# EAGLE board jlpcb-044 (EAGLE 5.06)
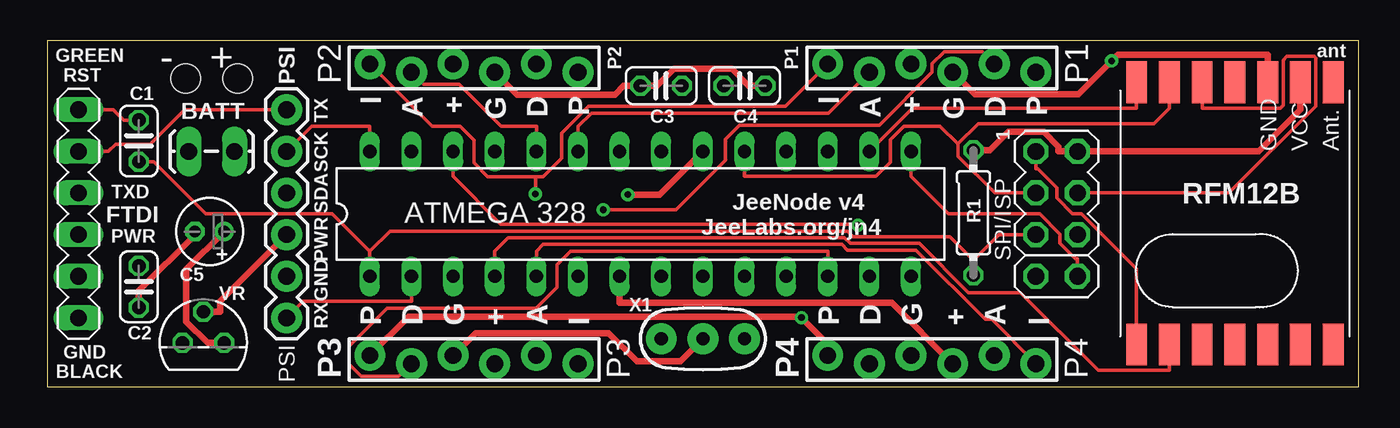
[diagram p0: board, top side]
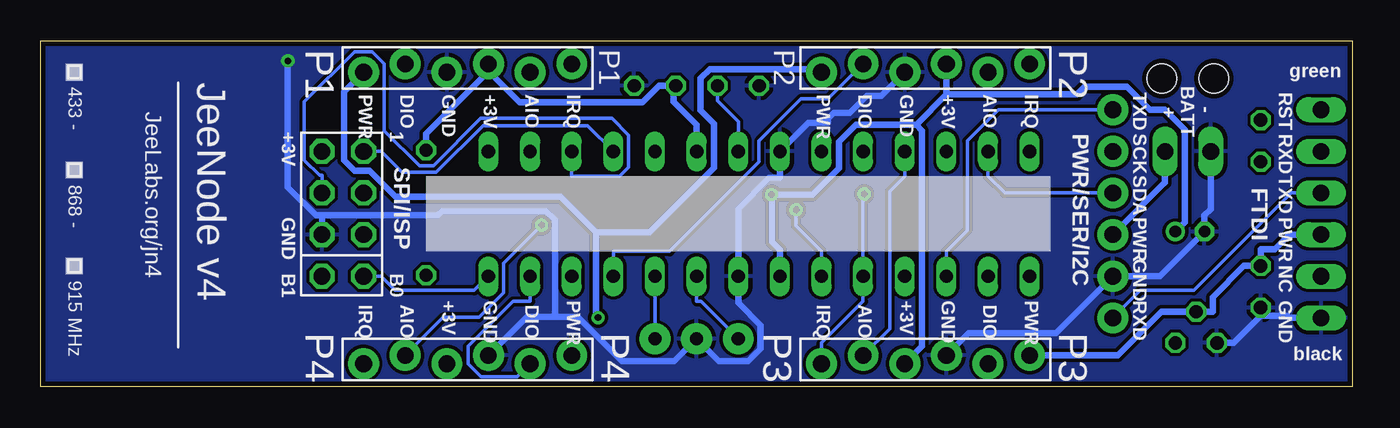
[diagram p1: board, bottom side, seen from below]

Size 80.01 x 21.08 mm. Coordinates in mm from the lower left corner, seen from the top.
Outline: 0,0 80.01,0 80.01,21.08 0,21.08 0,0
Copper layers (1*16): Top 0.035mm / dielectric 1.5mm / Bottom 0.035mm
Design rules "10mils *": minimum track width 8mil, minimum drill 0.4mm, track to track 8mil, track to pad 8mil, pad to pad 8mil, via to via 8mil, smd to smd 8mil, copper to edge 12mil, drill to drill 0.4mm, minimum pad ring 0.15mm, minimum via ring 8mil, stop-mask expansion 4mil, vias tented up to drill 20mil, thermal gap 10mil
Net classes: 1 power: width 0.406 mm
Holes 1.78 mm at 8.45,18.8 11.62,18.8

## Footprints (pad centres in the part's own frame; a part is rotated, then mirrored left to right if it is on the bottom)
C025-024X044 = drill 0.813 octagon: 1 -1.27,0; 2 1.27,0
E1,8-4 = drill 0.711 pad 1.168 round: + -0.889,0 | drill 0.711 pad 1.168 octagon: - 0.889,0
MA06-1 = drill 1.016 long: 1 -6.35,0; 2 -3.81,0; 3 -1.27,0; 4 1.27,0; 5 3.81,0; 6 6.35,0
DIL28-3 = drill 0.813 long: 1 -16.51,-3.81; 2 -13.97,-3.81; 3 -11.43,-3.81; 4 -8.89,-3.81; 5 -6.35,-3.81; 6 -3.81,-3.81; 7 -1.27,-3.81; 8 1.27,-3.81; 9 3.81,-3.81; 10 6.35,-3.81; 11 8.89,-3.81; 12 11.43,-3.81; 13 13.97,-3.81; 14 16.51,-3.81; 15 16.51,3.81; 16 13.97,3.81; 17 11.43,3.81; 18 8.89,3.81; 19 6.35,3.81; 20 3.81,3.81; 21 1.27,3.81; 22 -1.27,3.81; 23 -3.81,3.81; 24 -6.35,3.81; 25 -8.89,3.81; 26 -11.43,3.81; 27 -13.97,3.81; 28 -16.51,3.81
TO92 = drill 0.813 octagon: 1 -1.27,0; 2 0,1.905; 3 1.27,0
1X02_LOCK_LONGPADS = drill 1.016 long: 1 -0.127,0; 2 2.667,0
1X06_FEMALE_LOCK.010 = drill 1.016 pad 1.88 round: 1 0,0.254; 2 2.54,-0.254; 3 5.08,0.254; 4 7.62,-0.254; 5 10.16,0.254; 6 12.7,-0.254
1X06 = drill 1.016 pad 1.88 round: 1 0,0; 2 2.54,0; 3 5.08,0; 4 7.62,0; 5 10.16,0; 6 12.7,0
0204/7 = drill 0.813 octagon: 1 -3.81,0; 2 3.81,0
MA04-2 = drill 1.016 octagon: 1 -3.81,-1.27; 2 -3.81,1.27; 3 -1.27,-1.27; 4 -1.27,1.27; 5 1.27,-1.27; 6 1.27,1.27; 7 3.81,-1.27; 8 3.81,1.27
RFM12B = smd 2.54 x 1.27: ANT 8,-6; FFS -8,2; GND 8,-2; IRQ -8,4; P$8 -8,0; P$9 -8,-2; P$10 -8,-4; P$12 -8,-6; P$16 8,0; SCK 8,4; SDI 8,2; SDO -8,6; SEL 8,6; VDD 8,-4
RESONATOR-PTH = drill 0.8 pad 1.88 round: 1 -2.54,0; 2 0,0; 3 2.54,0

## Placement (x,y rotation side)
C1  0.1µ  [C025-024X044]  5.59,14.99 90 top
C2  0.1µ  [C025-024X044]  5.59,6.1 270 top
C3  0.1µ  [C025-024X044]  37.47,18.35 180 top
C4  0.1µ  [C025-024X044]  42.55,18.35 0 top
C5  10µ  [E1,8-4]  9.91,9.46 180 top
FTDI  FTDI  [MA06-1]  1.91,10.54 90 top
IC1  ATMEGA 328  [DIL28-3]  36.2,10.54 0 top
IC2  MCP1702-33  [TO92]  9.53,2.67 0 top
JP1  BATT  [1X02_LOCK_LONGPADS]  11.3,14.35 180 top
P1  JEEPORT  [1X06_FEMALE_LOCK.010]  60.33,19.43 180 top
P2  JEEPORT  [1X06_FEMALE_LOCK.010]  32.39,19.43 180 top
P3  JEEPORT  [1X06_FEMALE_LOCK.010]  19.68,1.65 0 top
P4  JEEPORT  [1X06_FEMALE_LOCK.010]  47.62,1.65 0 top
PWR/SER/I2C  PSI  [1X06]  14.61,4.19 90 top
R1  10k  [0204/7]  56.52,10.6 90 top
SV7  SPI/ISP  [MA04-2]  61.59,10.54 270 top
U$1  RFM12B  [RFM12B]  72.47,10.57 90 top
X1  16 MHz  [RESONATOR-PTH]  40.01,2.92 0 top

## Library data of the parts
C1-C5 R1 = resistor
FTDI IC2 P1-P4 SV7 U$1 = JeeLabs
IC1 = atmega8
JP1 PWR/SER/I2C X1 = SparkFun

## Nets
A0: IC1.23 P1.5
A1: IC1.24 P2.5
A2: IC1.25 P3.5
A3: IC1.26 P4.5
GND [power]: C2.2 C3.2 C4.2 C5.- FTDI.1 IC1.8 IC1.22 IC2.1 JP1.2 P1.3 P2.3 P3.3 P4.3 PWR/SER/I2C.2 SV7.6 U$1.GND X1.2
INT2: IC1.5 P1.6 P2.6 P3.6 P4.6
N$1: IC1.9 X1.1
N$2: IC1.18 SV7.1 U$1.SDO
N$3: IC1.17 SV7.4 U$1.SDI
N$4: IC1.16 U$1.SEL
N$5: IC1.19 SV7.3 U$1.SCK
N$6: IC1.15 SV7.8
N$7: IC1.4 U$1.IRQ
N$8: IC1.6 P1.2
N$9: IC1.11 P2.2
N$10: IC1.12 P3.2
N$11: IC1.13 P4.2
N$19: C3.1 IC1.21
N$20: C1.2 FTDI.6
N$21: IC1.10 X1.3
N$22: IC1.14 SV7.7
N$24: IC1.28 PWR/SER/I2C.5
N$25: IC1.27 PWR/SER/I2C.4
PWR [power]: C2.1 FTDI.3 IC2.2 JP1.1 P1.1 P2.1 P3.1 P4.1 PWR/SER/I2C.3
RST: C1.1 IC1.1 R1.1 SV7.5
RXD: FTDI.4 IC1.2 PWR/SER/I2C.1
TXD: FTDI.5 IC1.3 PWR/SER/I2C.6
VCC [power]: C4.1 C5.+ IC1.7 IC1.20 IC2.3 P1.4 P2.4 P3.4 P4.4 R1.2 SV7.2 U$1.VDD

## Tracks (layer width: path | path; a pad name or v marks a point on that pad's centre or on a via)
A0
  Top 0.203: P1.5 47.68,16.69 33.2,16.69 32.39,15.88 IC1.23
A1
  Top 0.203: IC1.24 29.84,15.88 27.68,15.88 25.12,18.44 22.96,18.44 P2.5
A2
  Bottom 0.203: P3.5 28.22,3.53 28.22,11.91 27.3,12.83 IC1.25
A3  (via drill 0.4 pad 0.81)
  Top 0.203: IC1.26 24.76,12.83 27.67,9.92 49.39,9.92 v49.46,9.85
  Bottom 0.203: P4.5 55.46,4.23 53.28,4.23 51.79,5.72 51.79,7.52 v49.46,9.85
GND  (via drill 0.4 pad 0.81)
  Top 0.406: C2.2 5.59,5.84 9.02,9.27 C5.- | P1.3 56.59,17.83 62.91,17.83 v64.95,19.87 65.32,20.24 74.47,20.24 U$1.GND | C4.2 43.31,18.35 42.8,18.35 41.77,19.38 38.23,19.38 37.21,18.35 C3.2 35.18,18.35 34.63,17.8 28.68,17.8 P2.3 | X1.2 38.63,1.55 35.98,1.55 34.26,3.27 26.13,3.27 P3.3
  Bottom 0.406: 48.65,4.25 47.28,4.25 44.57,1.54 41.39,1.54 X1.2 38.64,1.55 36.88,1.55 36.12,2.32 36.12,3.76 37.47,5.1 IC1.8 37.47,8.36 37.47,10.86 35.6,12.73 34.93,12.73 IC1.22 33.18,16.09 31.98,16.09 31.98,16.35 31.62,16.7 30.64,16.7 29.6,17.74 28.74,17.74 P2.3 | P4.3 50.36,4.25 48.65,4.25 | 62.87,10.44 55.81,10.44 55.54,10.71 49.18,10.71 48.65,10.18 48.65,4.25 | 62.87,10.44 63.22,10.44 64.95,12.17 v64.95,19.87 | 62.87,10.44 | P3.3 23.42,3.25 18.08,3.25 PWR/SER/I2C.2 11.75,6.73 C5.- 9.02,10.45 8.64,10.83 JP1.2 | 7.24,2.67 IC2.1 | 5.59,4.32 7.24,2.67 | 7.24,2.67 | 5.59,4.32 3.96,4.32 3.84,4.19 FTDI.1 | 5.59,4.32 C2.2 | 62.87,10.44 SV7.6
  pour Bottom: 0,21.08 80.01,21.08 80.01,0 0,0
INT2  (via drill 0.4 pad 0.81)
  Top 0.203: P4.6 57.63,4.09 57.24,4.09 53.01,8.33 48.83,8.33 48.48,8.68 30.27,8.68 29.84,8.26 IC1.5 | v29.78,11.75 29.78,12.82 | 29.78,12.82 30.26,12.82 31.38,13.93 31.38,15.46 33.02,17.1 45.04,17.1 P1.6 | P2.6 23.49,15.88 25.18,15.88 26.04,15.03 26.04,13.66 26.88,12.82 29.78,12.82
  Bottom 0.203: v29.78,11.75 29.84,11.68 29.84,8.26 IC1.5 29.84,5.97 29.84,5.21 32.39,2.67 P3.6
N$1
  Bottom 0.203: IC1.9 40.01,5.21 39.75,5.21 X1.1
N$2
  Top 0.203: SV7.1 60.33,13.28 60.44,13.28 61.59,12.12 61.59,11.51 62.56,10.54 63.11,10.54 66.47,7.18 U$1.SDO
  Bottom 0.203: IC1.18 46.66,15.92 53.04,15.92 55.89,13.07 57.98,13.07 59.26,14.35 SV7.1
N$3
  Top 0.203: U$1.SDI 70.47,16.99 75.23,16.99 75.41,17.17 75.41,19.92 75.63,20.14 77.3,20.14 77.41,20.03 77.41,17.11 72.11,11.81 SV7.4
  Bottom 0.203: IC1.17 47.62,12.83 44.71,12.83 44.16,13.38 44.16,15.33 45.18,16.36 53.18,16.36 56.06,13.48 56.92,13.48 59.07,15.62 59.07,19.68 59.81,20.42 60.88,20.42 63.94,17.36 63.94,13.82 63,12.88 62.87,12.88 SV7.4
N$4
  Top 0.203: IC1.16 52.81,16.99 66.47,16.99 U$1.SEL
N$5
  Top 0.203: SV7.3 57.82,11.81 55.56,14.07 55.56,14.8 | 55.56,14.8 56.8,16.04 67.52,16.04 68.47,16.99 U$1.SCK | 55.56,14.8 54.47,15.89 52.28,15.89 51.44,15.05 51.44,13.69 50.57,12.83 42.55,12.83 IC1.19
N$6
  Top 0.203: IC1.15 52.71,12.83 54.99,10.54 60.57,10.54 61.8,9.31 61.8,8.73 62.73,7.8 62.87,7.8 SV7.8
N$7
  Top 0.203: IC1.4 27.3,8.26 28.13,9.08 48.65,9.08 49,8.73 53.22,8.73 56.21,5.74 59.39,5.74 64.13,0.99 68.47,0.99 U$1.IRQ
N$8  (via drill 0.4 pad 0.81)
  Top 0.203: P1.2 57.05,20.42 54.73,20.42 53.99,19.68 53.99,19.17 50.77,15.95 42.25,15.95 41.39,15.09 41.39,13.81 38.36,10.79 v33.94,10.79
  Bottom 0.203: v33.94,10.79 33.94,9.81 32.39,8.26 IC1.6
N$9
  Bottom 0.203: P2.2 31.98,17.55 33.64,17.55 36.2,15 36.2,13.71 41.65,8.26 45.09,8.26 IC1.11
N$10
  Top 0.203: P3.2 21.45,0.62 19.15,0.62 18.42,1.36 18.42,2.45 20.75,4.78 29.82,4.78 31.11,6.07 31.11,7.44 31.93,8.26 47.62,8.26 IC1.12
N$11
  Bottom 0.203: IC1.13 50.16,5.21 51.21,5.21 53.96,2.46 53.96,1.4 53.17,0.61 50.96,0.61 P4.2
N$19
  Bottom 0.203: C3.1 38.73,17.44 37.47,16.17 IC1.21
N$20
  Top 0.203: C1.2 4.67,16.26 4.04,16.89 FTDI.6
N$21
  Bottom 0.203: X1.3 IC1.10
N$22
  Bottom 0.203: SV7.7 59.26,6.73 58.39,5.87 53.57,5.87 IC1.14
N$24
  Top 0.203: IC1.28 19.68,15.88 16.13,15.88 PWR/SER/I2C.5
N$25
  Bottom 0.203: IC1.27 22.22,12.83 21.21,11.81 PWR/SER/I2C.4
PWR  (via drill 0.4 pad 0.81)
  Top 0.406: IC2.2 10.54,4.57 10.54,5.21 PWR/SER/I2C.3 | P4.1 47.62,2.6 v46.02,4.2 45.96,4.27 22.05,4.27 P3.1
  Bottom 0.406: 46.13,9.41 48.31,11.59 58.38,11.59 59.97,13.18 60.88,13.18 61.51,13.81 61.51,18 P1.1 | 46.13,9.41 42.88,9.41 38.95,13.34 38.95,16.03 39.77,16.85 39.77,18.8 39.19,19.37 32.58,19.37 P2.1 | v46.02,4.2 46.13,4.31 46.13,9.41 | P3.1 14.31,1.91 11.64,4.57 IC2.2 8.51,4.57 8.51,5.46 6.6,7.37 C2.1 5.59,8.38 4.72,8.38 3.84,9.27 FTDI.3 | JP1.1 11.43,12.42 11.46,12.42 PWR/SER/I2C.3
RST
  Top 0.203: 19.68,8.26 20.92,9.49 48.82,9.49 49.17,9.14 55.08,9.14 56.52,7.71 | 19.68,8.26 17.4,10.54 9.68,10.54 6.5,13.72 C1.1 | 19.68,8.26 IC1.1 | 56.52,7.71 58.08,9.27 59.26,9.27 SV7.5 | 56.52,7.71 R1.1
RXD
  Top 0.203: IC1.2 22.22,5.21 15.62,5.21 PWR/SER/I2C.1
  Bottom 0.203: FTDI.4 3.73,11.81 9.68,5.87 12.93,5.87 PWR/SER/I2C.1
TXD
  Top 0.203: FTDI.5 3.73,14.35 4.18,14.79 6.29,14.79 8.39,16.89 PWR/SER/I2C.6
  Bottom 0.203: IC1.3 24.76,8.26 23.49,9.53 23.49,14.99 21.59,16.89 PWR/SER/I2C.6
VCC  (via drill 0.4 pad 0.81)
  Top 0.406: IC1.20 37.36,11.71 v35.42,11.71 | IC1.7 34.93,5.1 51.54,5.1 P4.4 | R1.2 57.53,14.41 58.65,15.54 60.8,15.54 61.7,14.64 61.7,14.35 SV7.2 73.93,14.35 76.47,16.89 U$1.VDD | IC2.3 9.78,2.67 8.48,3.96 8.48,7.15 C5.+
  Bottom 0.406: 24.76,17.82 26.61,15.98 | 26.61,15.98 30.3,15.98 31.33,14.94 31.33,13.31 32.94,11.71 v35.42,11.71 35.42,8.85 34.93,8.36 IC1.7 | P3.4 26.25,2.45 26.25,15.62 26.61,15.98 | 24.76,17.82 16.82,17.82 16.36,18.28 13.75,18.28 12.36,16.89 11.44,16.89 10.23,15.68 10.23,10.03 C5.+ | 24.76,17.82 P2.4 | IC1.20 40.01,15.98 41.41,17.38 41.41,18.35 | 41.41,18.35 C4.1 | 41.41,18.35 41.5,18.35 42.29,18.35 43.31,17.33 50.8,17.33 52.71,19.24 | 52.71,19.24 P1.4 | 52.71,19.24 56.52,15.43 R1.2

## Text on the board
_tsilk: P2 | P1 | GREEN | ant | - | + | RST | PSI | I | A | + | G | D | P | I | A | + | G | D | P | C1 | TX | C3 | C4 | SCK | 1 | SDA | TXD | JeeNode v4 | RFM12B | FTDI | PWR | R1 | PWR | JeeLabs.org/jn4 | GND | C5 | VR | RX | P | D | G | + | A | I | X1 | P | D | G | + | A | I | C2 | GND | BLACK | P3 | P4
_bsilk: P2 | P2 | P1 | P1 | green | RST | BATT | TXD | IRQ | AIO | +3V | GND | DIO | PWR | IRQ | AIO | +3V | GND | DIO | PWR | JeeNode v4 | 433 - | - | + | JeeLabs.org/jn4 | RXD | SCK | PWR/SER/I2C | 1 | +3V | TXD | SDA | SPI/ISP | FTDI | 868 - | PWR | PWR | GND | GND | NC | B0 | B1 | 915 MHz | GND | RXD | PWR | DIO | GND | +3V | AIO | IRQ | PWR | DIO | GND | +3V | AIO | IRQ | P3 | P3 | P4 | P4 | black